# Altium PCB PCB1.PcbDoc
Units mm, origin at the board's own origin, x right, y up, seen from the top; angles counter-clockwise.
Board outline 53.34 x 80.01 mm, 2 copper layers (Top Layer, Bottom Layer); 34 components, 56 nets, 230 pads, 58 vias.
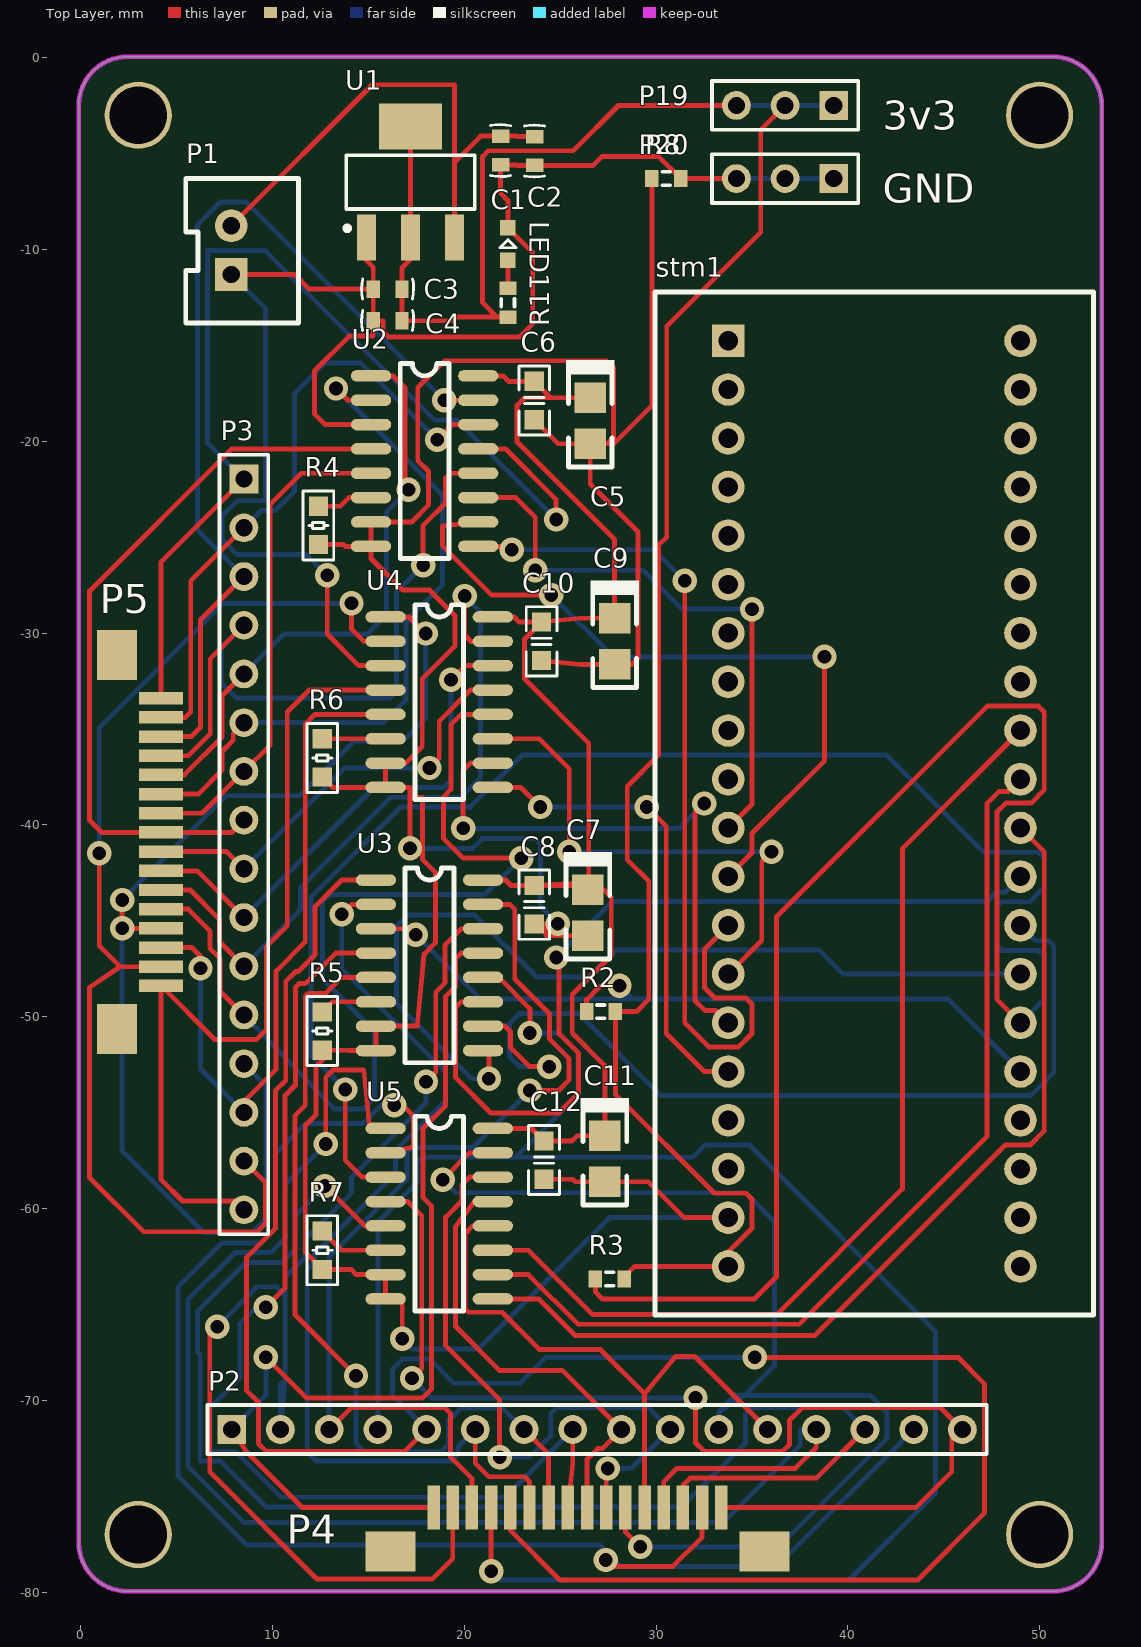
[diagram p0: Top Layer view]
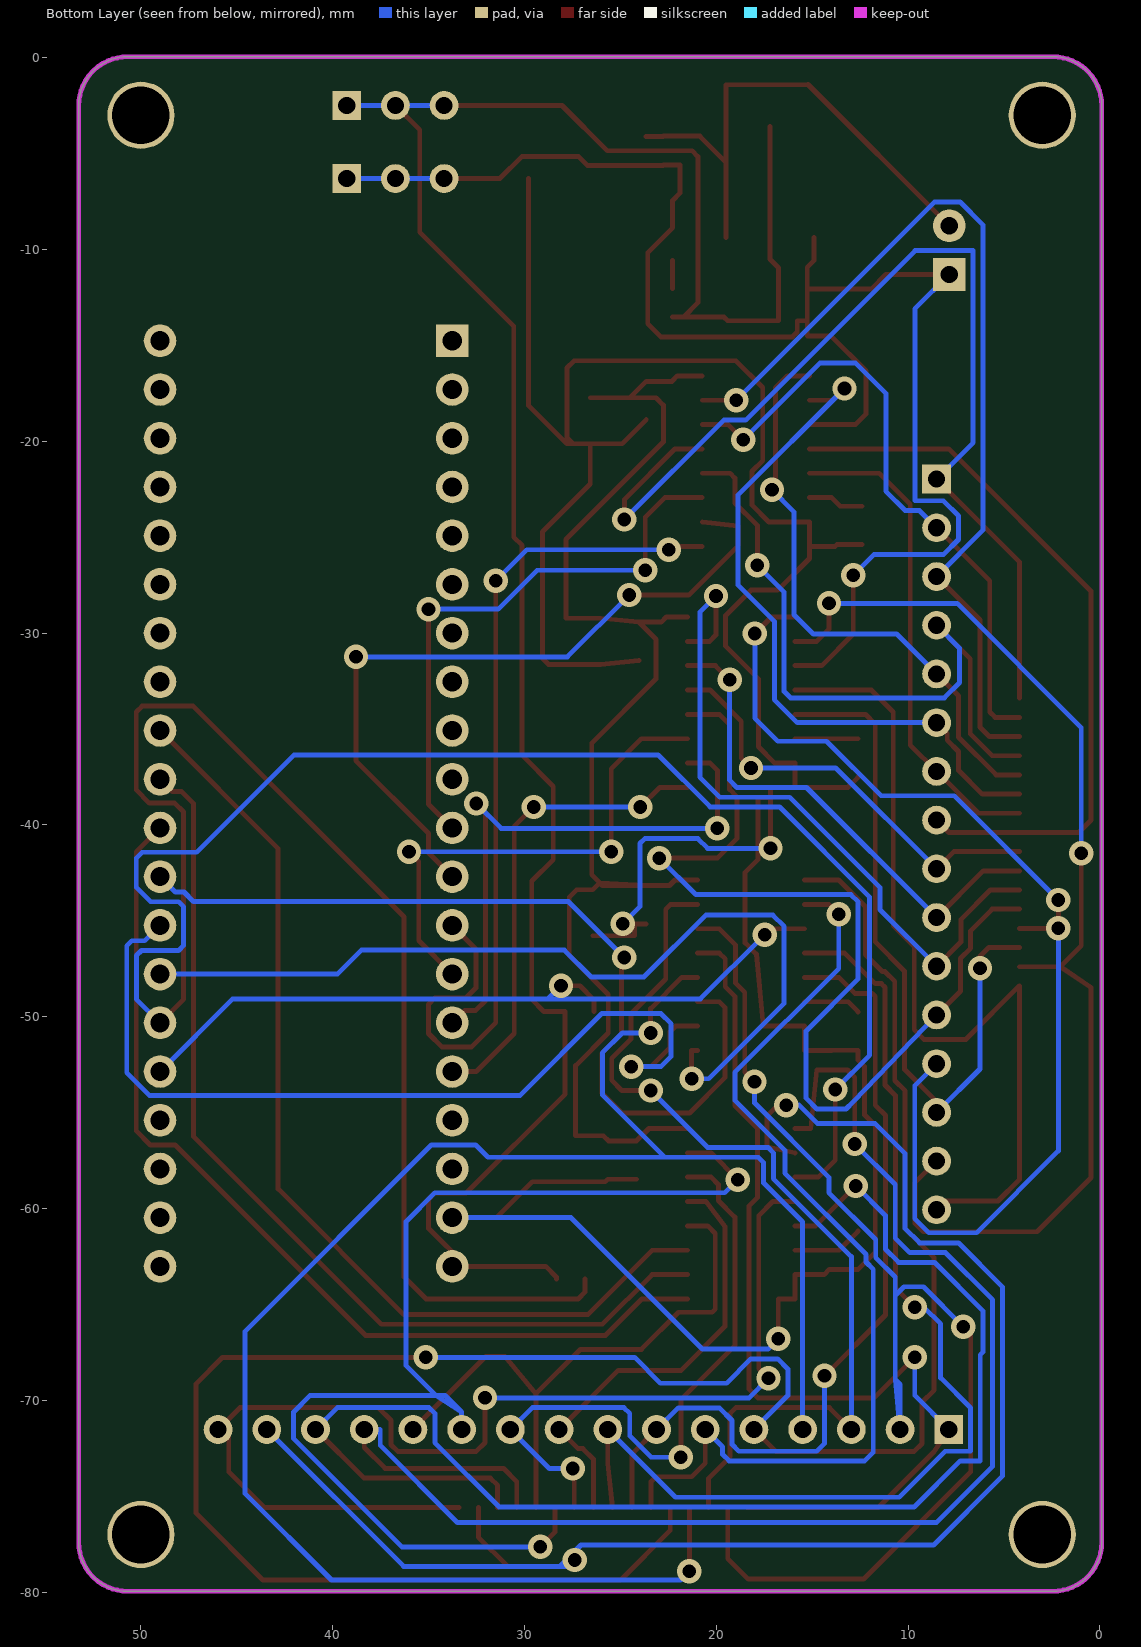
[diagram p1: Bottom Layer view, seen from below]
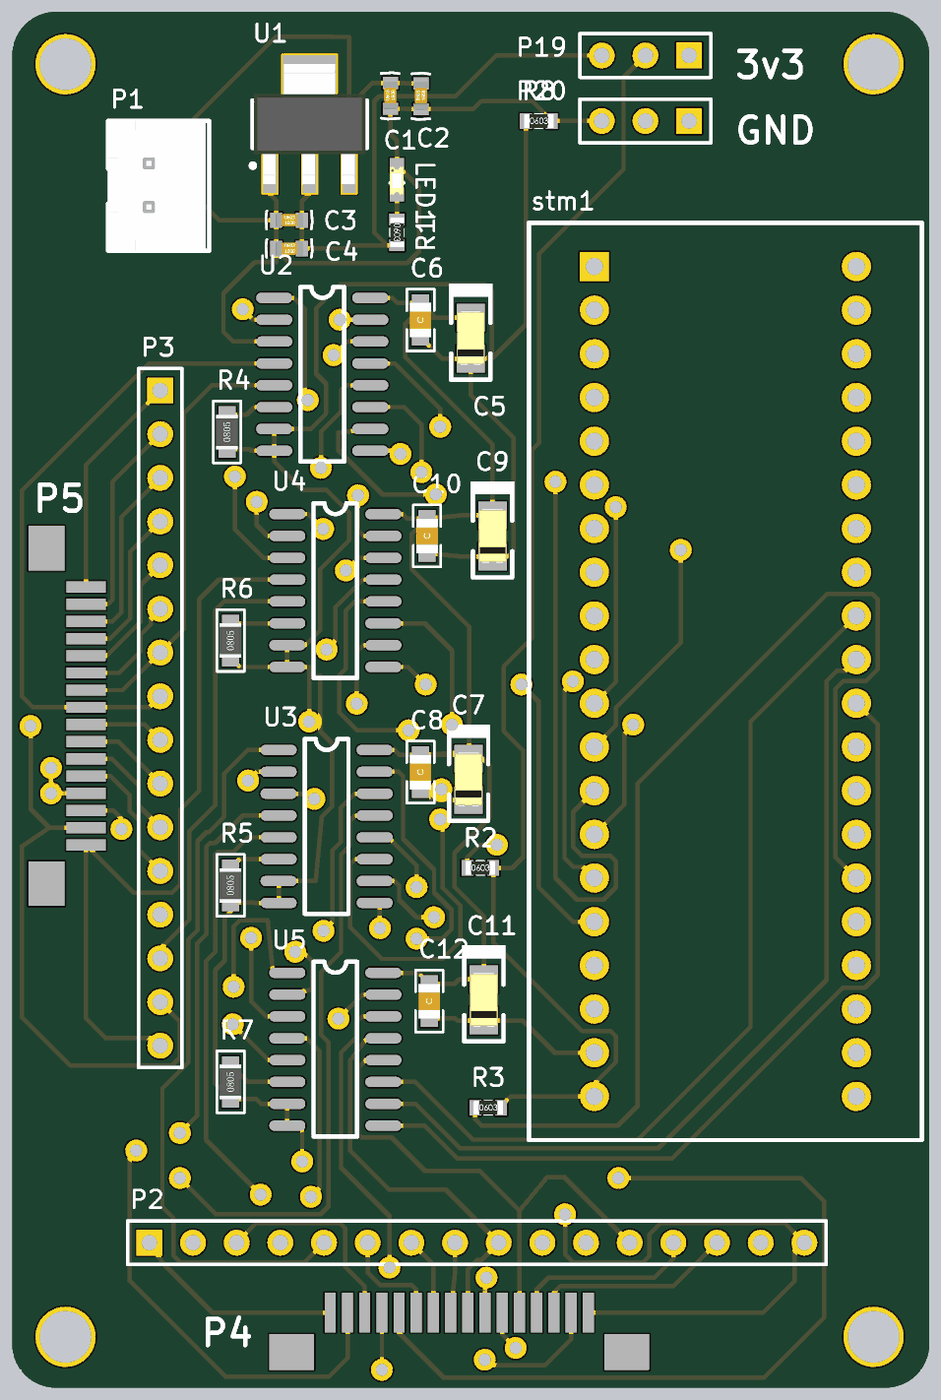
[diagram p2: 3D render of the assembled board from above, using the file's embedded part models]

## Layer stack, top to bottom
Top Solder: solder mask 0.0102, Solder Resist, Dk 3.5
Top Layer: signal copper 0.0356
Dielectric 1: dielectric 0.32, FR-4, Dk 4.8
Bottom Layer: signal copper 0.0356
Bottom Solder: solder mask 0.0102, Solder Resist, Dk 3.5

## Board outline
2.438,-79.959 cw(c2.438,-77.419) -0.102,-77.419 -0.102,-2.489 cw(c2.438,-2.489) 2.438,0.051 50.698,0.051 cw(c50.698,-2.489) 53.238,-2.489 53.238,-77.419 cw(c50.698,-77.419) 50.698,-79.959

## Design rules (kind name [scope] priority, off if disabled: settings)
Clearance [All] p1: gap=0.254 ignorepadtopadclearanceinfootprint=FALSE except(0: Arc-Hole Track-Hole SMDPad-Hole THPad-Hole Via-Hole Fill-Hole Poly-Hole Region-Hole Text-Hole)
PolygonConnect [All] p1: connectstyle=Relief reliefconductorwidth=0.254 reliefentries=4 polygonreliefangle="90 Angle" airgapwidth=0.254
RoutingVias [All] p1: holewidth=0.711 width=1.27 viastyle="Through Hole" minholewidth=0.711 minwidth=1.27 maxholewidth=0.711 maxwidth=1.27
SolderMaskExpansion [All] p1: expansion=0.102
Width [All] p1: maxlimit=0.254 minlimit=0.254 preferedwidth=0.254
30 further rules are at their usual default settings.

## Components (designator, comment, footprint, x,y, rotation, side; value= is the part's Value field where it differs from the comment)
C1 "" C-0603 22.428,-5.297 r90 top value=10uF
C2 "" C-0603 24.206,-5.321 r90 top value=0.1uF
C3 "" C-0603 15.545,-12.598 r0 top value=0.1uF
C4 "" C-0603 15.545,-14.249 r0 top value=10uF
C5 "Cap Pol2" Cap-TA 26.568,-18.929 r90 top value=10uF
C6 "Cap" 0805C 23.647,-17.872 r90 top value=100nF
C7 "Cap Pol2" Cap-TA 26.441,-44.583 r90 top value=10uF
C8 "Cap" 0805C 23.647,-44.161 r90 top value=100nF
C9 "Cap Pol2" Cap-TA 27.838,-30.429 r90 top value=10uF
C10 "Cap" 0805C 24.028,-30.429 r90 top value=100nF
C11 "Cap Pol2" Cap-TA 27.33,-57.41 r90 top value=10uF
C12 "Cap" 0805C 24.155,-57.48 r90 top value=100nF
LED1 "" CLED1608-0603 24.359,-9.398 r90 top
P1 "Header 2" XH2.54-LI-2P 7.849,-10.033 r90 top
P2 "Header 16" HDR1X16 7.874,-71.526 r0 top
P3 "Header 16" HDR1X16 8.509,-21.971 r270 top
P4 "Header 16" ffc_1mm 18.4,-75.59 r0 top
P5 "Header 16" ffc_1mm 4.191,-33.395 r270 top
P19 "Header 3" HDR1X3 39.268,-2.489 r180 top
P20 "Header 3" HDR1X3 39.268,-6.299 r180 top
R1 "Res3" R-0603 22.276,-12.725 r270 top value=370R
R2 "Res3" R-0603 27.076,-49.733 r0 top value=10k
R3 "Res3" R-0603 27.534,-63.678 r0 top value=10k
R4 "Res" 0805R 12.395,-24.384 r90 top value=1k
R5 "Res" 0805R 12.598,-50.749 r90 top value=1k
R6 "Res" 0805R 12.598,-36.509 r90 top value=1K
R7 "Res" 0805R 12.598,-62.179 r90 top value=1K
R8 "Res3" R-0603 30.48,-6.299 r0 top value=0
stm1 "stm32f103c8t6" PCBComponent_1 33.76,-14.76 r0 top
U1 "AMS1117-3V3" LM317 17.323,-6.481 r90 top value=Value
U2 "CD4051" SO16 19.202,-15.951 r0 top
U3 "CD4051" SO16 19.456,-42.24 r0 top
U4 "CD4051" SO16 19.964,-28.524 r0 top
U5 "CD4051" SO16 19.964,-55.194 r0 top

## Footprints (in the part's own frame and the unit in brackets; to place one, negate y for a bottom-side part, rotate by r counter-clockwise, add the part's x,y. Pads: shape width x height; smd on the part's side, far side on the other; paste and mask are expansions set on the pad)
0805C [mm]
  rect 1x1 smd: 1(-1,0) 2(1,0)
  silkscreen extent -1.8,-0.8 1.8,0.8, body extent -1.01,-0.62 1,0.63, height 0.92
0805R [mm]
  rect 1x1 smd: 1(-1,0) 2(1,0)
  silkscreen extent -1.8,-0.8 1.8,0.8, body extent -1,-0.63 1,0.63, height 0.55
C-0603 [mm]
  rect 0.7x0.9 smd: 1(-0.293,0.533) 2(1.207,0.533)
  silkscreen extent -0.9,0.02 1.81,1.07, body extent -0.32,0.13 1.28,0.93, height 0.8
Cap-TA [mm]
  rect 1.6x1.65 smd: 1(1.2,0) 2(-1.2,0)
  silkscreen extent -2.41,-1.27 3.18,1.27, body extent -1.6,-0.8 1.6,0.8, height 1.61
CLED1608-0603 [mil]
  rect 32x32 smd: 1(-46,82) 2(20.93,82)
  silkscreen extent -20,65 -4,99, body extent -46,67 16,98, height 24
ffc_1mm [mm]
  rect 0.65x2.3 smd: 1(0,0) 2(1,0) 3(2,0) 4(3,0) 5(4,0) 6(5,0) 7(6,0) 8(7,0) 9(8,0) 10(9,0) 11(10,0) 12(11,0) 13(12,0) 14(13,0) 15(14,0) 16(15,0)
  rect 2.6x2.1 smd: 17(-2.25,-2.3) 18(17.25,-2.3)
HDR1X3 [mm] "Connector; Header; 3 Position"
  rect 1.5x1.5 hole 0.9: 1(0,0)
  round 1.5 hole 0.9: 2(2.54,0) 3(5.08,0)
  silkscreen extent -1.27,-1.27 6.35,1.27
HDR1X16 [mm] "Connector; Header; 16 Position"
  rect 1.5x1.5 hole 0.9: 1(0,0)
  round 1.5 hole 0.9: 2(2.54,0) 3(5.08,0) 4(7.62,0) 5(10.16,0) 6(12.7,0) 7(15.24,0) 8(17.78,0) 9(20.32,0) 10(22.86,0) 11(25.4,0) 12(27.94,0) 13(30.48,0) 14(33.02,0) 15(35.56,0) 16(38.1,0)
  silkscreen extent -1.27,-1.27 39.37,1.27
LM317 [mm] "LM317, SOT23"
  rect 2.4x1 smd paste-0.102 mask+0.051: 1(-2.9,2.427) 2(-2.9,0.127) 3(-2.9,-2.173)
  rect 2.4x3.3 smd paste-0.102 mask+0.051: 4(2.9,0.127)
  silkscreen extent -2.54,-3.22 1.4,3.55, body extent -3.5,-3.12 3.5,3.38, height 1.68
PCBComponent_1 [mm]
  rect 1.7x1.7 hole 1: 1(0,0)
  round 1.7 hole 1: 2(0,-2.54) 3(0,-5.08) 4(0,-7.62) 5(0,-10.16) 6(0,-12.7) 7(0,-15.24) 8(0,-17.78) 9(0,-20.32) 10(0,-22.86) 11(0,-25.4) 12(0,-27.94) 13(0,-30.48) 14(0,-33.02) 15(0,-35.56) 16(0,-38.1) 17(0,-40.64) 18(0,-43.18) 19(0,-45.72) 20(0,-48.26) 21(15.24,-48.26) 22(15.24,-45.72) 23(15.24,-43.18) 24(15.24,-40.64) 25(15.24,-38.1) 26(15.24,-35.56) 27(15.24,-33.02) 28(15.24,-30.48) 29(15.24,-27.94) 30(15.24,-25.4) 31(15.24,-22.86) 32(15.24,-20.32) 33(15.24,-17.78) 34(15.24,-15.24) 35(15.24,-12.7) 36(15.24,-10.16) 37(15.24,-7.62) 38(15.24,-5.08) 39(15.24,-2.54) 40(15.24,0)
  silkscreen extent -3.81,-50.8 19.05,2.54
R-0603 [mm]
  rect 0.7x0.9 smd: 1(-0.699,0) 2(0.801,0)
  silkscreen extent -0.15,-0.35 0.25,0.35, body extent -0.8,-0.4 0.9,0.4, height 0.56
SO16 [mm]
  oval 2.1x0.6 smd: 1(-4.064,-0.635) 2(-4.064,-1.905) 3(-4.064,-3.175) 4(-4.064,-4.445) 5(-4.064,-5.715) 6(-4.064,-6.985) 7(-4.064,-8.255) 8(-4.064,-9.525) 9(1.524,-9.525) 10(1.524,-8.255) 11(1.524,-6.985) 12(1.524,-5.715) 13(1.524,-4.445) 14(1.524,-3.175) 15(1.524,-1.905) 16(1.524,-0.635)
  silkscreen extent -2.54,-10.16 0,0
XH2.54-LI-2P [mm] "接插件，2P"
  rect 1.7x1.7 hole 0.9: 1(-1.27,0)
  round 1.7 hole 0.9: 2(1.27,0)
  silkscreen extent -3.81,-3.51 3.74,2.37, body extent -3.77,-3.3 3.77,2.4, height 7.05

## Part data
C1 C2 C3 C4: library part "Cap Semi", "Capacitor (Semiconductor SIM Model)", LatestRevisionDate=29-May-2009, LatestRevisionNote="IPC-7351 Footprint Added.", PackageDescription="Chip Capacitor", PackageReference=C1206, Published=8-Jun-2000, Publisher="Altium Limited"
C5 C7 C9 C11: "Polarized Capacitor (Axial)", LatestRevisionDate=17-Jul-2002, LatestRevisionNote="Re-released for DXP Platform.", PackageDescription="Polarized Capacitor; 2 Leads", PackageReference=POLAR0.8, Published=8-Jun-2000, Publisher="Altium Limited"
C6 C8 C10 C12: "Capacitor", LatestRevisionDate=17-Jul-2002, LatestRevisionNote="Re-released for DXP Platform.", PackageDescription="Radial Cap, Thru-Hole; 2 Leads; 0.3 in Pin Spacing", PackageReference=RAD-0.3, Published=8-Jun-2000, Publisher="Altium Limited"
LED1: library part "LED Chip", "Typical Chip LED", Published=8-Jun-2000, Publisher="Altium Limited", Revision="July-2002: Re-released for DXP Platform."
P1: "Header, 2-Pin", LatestRevisionDate=17-Jul-2002, LatestRevisionNote="Re-released for DXP Platform.", Publisher="Altium Limited"
P2 P3 P4 P5: "Header, 16-Pin", LatestRevisionDate=17-Jul-2002, LatestRevisionNote="Re-released for DXP Platform.", Publisher="Altium Limited"
P19 P20: "Header, 3-Pin", LatestRevisionDate=17-Jul-2002, LatestRevisionNote="Re-released for DXP Platform.", Publisher="Altium Limited"
R1 R2 R3 R4 R5 R6 R7 R8: "Resistor", Published=8-Jun-2000, Publisher="Altium Limited"
  R1 R2 R3 R8: LatestRevisionDate=29-May-2009, LatestRevisionNote="IPC-7351 Footprint Added.", PackageDescription="Chip Resistor", PackageReference=J1-0603
  R4 R5 R6 R7: LatestRevisionDate=17-Jul-2002, LatestRevisionNote="Re-released for DXP Platform.", PackageDescription="Axial Device, Thru-Hole; 2 Leads; 0.4 in Pin Spacing", PackageReference=AXIAL-0.4
U1: library part LM317DCYR, "LM317DCYR-SOT223", Alternate_PartNumber=LM317DCY, Manufacturer="Texas Instruments", CompType=IC, MountType=SMT, PackageReference=DCY0004A, PartNumber=LM317DCYR, PIN_COUNT=4, RefDes=RefDes, RoHS=Y, SymbolCreater=Altium, Type=TYPE

## Free pads (board coordinates)
  round 3.5 hole 3: 19(3,-3) 20(50,-3) 21(50,-77) 22(3,-77)

## Via types
v1: diameter 1.27, hole 0.711, Top Layer to Bottom Layer, 58 vias

## Nets (pads, with @x,y where several pads share a name; then routed paths per layer and width w, separated by ;. In a path a pad name is that pad's centre, name@x,y a point inside that pad or via, vN(x,y) a via of type N, cw(c..) or ccw(c..) an arc to the next point about the centre after c; other vN are vias at no path point)
ADC1: R2.1 stm1.25 U3.3 | length 40.3
  Top Layer w0.254: U3.3 17.17,-45.415 v1(17.475,-45.72) ; R2.1 26.377,-49.112 27.102,-48.387 v1(28.092,-48.387)
  Bottom Layer w0.254: v1(17.475,-45.72) 20.828,-49.073 28.778,-49.073 ; v1(28.092,-48.387) 28.778,-49.073 ; stm1.25 45.213,-49.073 28.778,-49.073
ADC2: R3.1 stm1.26 U5.3 | length 140.3
  Top Layer w0.254: v1(13.792,-53.797) 13.792,-57.48 14.681,-58.369 U5.3 ; R3.1 26.834,-64.35 27.203,-64.719 35.128,-64.719 36.271,-63.576 36.271,-44.806 47.269,-33.807 49.936,-33.807 50.241,-34.112 50.241,-38.176 49.555,-38.862 48.235,-38.862 47.769,-39.328 47.769,-49.089 stm1.26
  Bottom Layer w0.254: v1(13.792,-53.797) 12.002,-52.007 12.002,-43.764 16.701,-39.065 20.32,-39.065 23.038,-36.347 42.012,-36.347 47.092,-41.427 49.936,-41.427 50.241,-41.732 50.241,-43.256 49.488,-44.009 48.031,-44.009 47.769,-44.271 47.769,-46.287 48.031,-46.549 49.968,-46.549 50.231,-46.812 50.231,-49.089 stm1.26
AGND: C1.1 C2.1 C3.1 C4.1 LED1.2 P1.1 P20.1 P20.2 P20.3 R8.2 U1.1 U2.3 U4.3 | length 88
  Top Layer w0.254: P1.1 11.151,-11.303 11.913,-12.065 C3.1 ; v1(12.852,-26.975) 12.852,-30.048 14.503,-31.699 U4.3 ; U1.1 14.896,-10.566 15.252,-10.922 C3.1 ; U2.3 12.741,-19.126 12.183,-18.569 12.183,-16.332 13.999,-14.517 15.252,-14.517 C4.1 ; P20.3 R8.2 30.138,-5.156 27.178,-5.156 26.721,-5.613 C2.1 22.782,-5.613 22.758,-5.589 C1.1 21.895,-7.061 22.276,-7.442 LED1.2 23.571,-10.162 23.571,-13.868 22.885,-14.554 16.027,-14.554 15.773,-14.3 15.773,-13.716 C4.1 ; C4.1 C3.1
  Bottom Layer w0.254: P1.1 9.64,-13.094 9.64,-23.102 8.153,-23.102 7.366,-23.889 7.366,-25.121 8.153,-25.908 11.786,-25.908 v1(12.852,-26.975) ; P20.3 P20.2 P20.1
DVDD_3V3: C3.2 C4.2 P19.1 P19.2 P19.3 R1.2 R2.2 R3.2 stm1.20 U1.2 U1.4 | length 120.3
  Top Layer w0.254: U1.4 U1.2 17.196,-10.504 16.752,-10.947 C3.2 C4.2 19.406,-13.716 19.595,-13.526 21.705,-13.526 ; R1.2 21.705,-13.526 ; R3.2 28.334,-63.576 28.891,-63.02 stm1.20@33.017,-63.02 ; stm1.20 stm1.20@33.017,-63.02 ; P19.3 28.042,-2.489 25.679,-4.851 21.26,-4.851 20.955,-5.156 20.955,-12.776 21.705,-13.526 ; P19.2 35.458,-3.759 35.458,-9.093 30.556,-13.995 30.556,-24.994 30.124,-25.425 30.124,-36.373 28.499,-37.998 28.499,-41.808 29.616,-42.926 29.616,-49.098 28.981,-49.733 R2.2 27.877,-54.039 33.045,-59.207 34.696,-59.207 35.001,-59.512 35.001,-61.036 stm1.20@33.017,-63.02
  Bottom Layer w0.254: P19.3 P19.2 P19.1
GND: C5.2 C6.1 C7.2 C8.1 C9.2 C10.1 C11.2 C12.1 R4.1 R5.1 R6.1 R7.1 R8.1 stm1.19 U2.7 U2.8 U3.7 U3.8 U4.7 U4.8 U5.7 U5.8 | length 176.1
  Top Layer w0.254: R4.1 13.716,-25.384 13.808,-25.476 U2.8 ; R6.1 13.138,-38.049 U4.8 ; v1(16.764,-66.802) 16.764,-64.719 U5.8 U5.7 14.367,-63.449 14.097,-63.179 R7.1 11.709,-62.29 11.709,-55.677 12.268,-55.118 12.268,-52.603 12.598,-52.273 R5.1 13.97,-51.749 13.986,-51.765 U3.8 U3.7 17.551,-50.495 17.907,-46.736 18.491,-46.152 18.491,-42.474 17.816,-41.799 17.816,-38.568 17.17,-38.568 ; v1(17.17,-41.224) 17.17,-38.568 ; C8.1 v1@24.269,-45.161 ; C6.1 24.904,-20.129 C5.2 ; C10.1 26.032,-31.629 C9.2 28.747,-31.629 29.058,-31.318 29.058,-24.714 26.568,-22.225 C5.2 ; C12.1 25.654,-58.48 25.784,-58.61 C11.2 29.591,-58.61 31.461,-60.48 stm1.19 ; v1(24.867,-45.161) v1@24.269,-45.161 ; C7.2 24.269,-45.783 v1@24.269,-45.161 ; R8.1 29.781,-18.136 27.788,-20.129 27.457,-20.129 ; U2.8 15.138,-26.111 16.789,-27.762 18.186,-27.762 19.507,-29.083 19.507,-30.683 17.805,-32.385 17.805,-35.916 16.942,-36.779 U4.7 U4.8 ; U2.8 U2.7 17.255,-24.206 18.144,-23.317 18.144,-21.573 17.577,-21.006 17.577,-17.196 18.974,-15.799 27.407,-15.799 27.788,-16.18 27.788,-19.799 27.457,-20.129 ; U4.8 17.17,-38.049 17.17,-38.568 ; C5.2 27.457,-20.129
  Bottom Layer w0.254: v1(16.764,-66.802) 17.297,-67.335 20.716,-67.335 27.572,-60.48 stm1.19 ; v1(17.17,-41.224) 20.447,-41.224 20.955,-40.716 23.724,-40.716 23.978,-40.97 23.978,-44.272 v1(24.867,-45.161)
NetLED1_1: LED1.1 R1.1 | length 1.5
  Top Layer w0.254: R1.1 LED1.1
Switch1_Down_A: stm1.11 U2.11 | length 30.2
  Top Layer w0.254: U2.11 22.682,-22.936 23.698,-23.952 v1(23.698,-26.721) ; stm1.11 35.001,-38.919 v1(35.001,-28.753)
  Bottom Layer w0.254: v1(23.698,-26.721) 29.337,-26.721 31.369,-28.753 v1(35.001,-28.753)
Switch1_Down_B: stm1.12 U2.10 | length 38.8
  Top Layer w0.254: U2.10 18.858,-24.424 18.858,-25.436 21.438,-28.016 v1(24.536,-28.016) ; stm1.12 35.001,-41.459 35.001,-40.437 38.786,-36.652 v1(38.786,-31.242)
  Bottom Layer w0.254: v1(24.536,-28.016) 27.762,-31.242 v1(38.786,-31.242)
Switch1_Down_C: stm1.13 U2.9 | length 47
  Top Layer w0.254: U2.9 22.301,-25.476 v1(22.479,-25.654) ; v1(31.496,-27.28) 31.496,-50.317 32.766,-51.587 34.29,-51.587 35.001,-50.876 35.001,-49.352 34.671,-49.022 33.045,-49.022 32.529,-48.506 32.529,-46.471 stm1.13
  Bottom Layer w0.254: v1(22.479,-25.654) 29.87,-25.654 v1(31.496,-27.28)
Switch1_Down_INH: R4.2 U2.6 | length 2.9
  Top Layer w0.254: R4.2 13.538,-23.384 13.986,-22.936 U2.6
Switch1_Up_A: stm1.29 U3.11 | length 46.3
  Top Layer w0.254: U3.11 19.837,-49.225 19.546,-49.517 19.546,-53.182 21.387,-55.024 24.917,-55.024 25.959,-53.982 25.959,-51.911 24.943,-50.895 24.943,-47.066 v1(24.79,-46.914)
  Bottom Layer w0.254: v1(24.79,-46.914) 27.711,-43.993 47.261,-43.993 47.753,-43.501 48.199,-43.501 stm1.29
Switch1_Up_B: stm1.28 U3.10 | length 48.5
  Top Layer w0.254: U3.10 22.123,-50.495 22.403,-50.775 22.403,-51.587 23.419,-52.603 v1(24.435,-52.603)
  Bottom Layer w0.254: v1(24.435,-52.603) 22.885,-52.603 22.352,-52.07 22.352,-50.368 22.885,-49.835 25.959,-49.835 30.226,-54.102 49.555,-54.102 50.739,-52.918 50.739,-46.304 50.476,-46.041 49.801,-46.041 stm1.28
Switch1_Up_C: stm1.27 U3.9 | length 47.5
  Top Layer w0.254: U3.9 21.285,-51.765 v1(21.285,-53.238)
  Bottom Layer w0.254: v1(21.285,-53.238) 20.388,-53.238 16.459,-49.309 16.459,-45.288 17.043,-44.704 20.549,-44.704 23.774,-47.93 26.518,-47.93 27.915,-46.533 38.506,-46.533 39.754,-47.78 stm1.27
Switch1_Up_INH: R5.2 U3.6 | length 3
  Top Layer w0.254: R5.2 13.122,-49.225 U3.6
Switch2_Down_A: stm1.14 U4.11 | length 26.8
  Top Layer w0.254: U4.11 23.901,-35.509 25.476,-37.084 v1(25.476,-41.402) ; stm1.14 35.509,-46.031 35.509,-41.91 v1(36.017,-41.402)
  Bottom Layer w0.254: v1(25.476,-41.402) v1(36.017,-41.402)
Switch2_Down_B: stm1.15 U4.10 | length 30.5
  Top Layer w0.254: v1(19.939,-40.184) 19.939,-37.16 20.32,-36.779 U4.10 ; v1(32.512,-38.887) 32.021,-39.378 32.021,-49.155 32.537,-49.672 33.112,-49.672 stm1.15
  Bottom Layer w0.254: v1(19.939,-40.184) 31.215,-40.184 v1(32.512,-38.887)
Switch2_Down_INH: R6.2 U4.6 | length 3.3
  Top Layer w0.254: R6.2 U4.6
Switch2_Up_A: stm1.32 U5.11 | length 51.9
  Top Layer w0.254: U5.11 23.343,-62.179 26.695,-65.532 36.291,-65.532 42.841,-58.983 42.841,-41.239 stm1.32
Switch2_Up_B: stm1.31 U5.10 | length 50.5
  Top Layer w0.254: U5.10 23.343,-63.449 25.933,-66.04 37.465,-66.04 47.261,-56.244 47.261,-38.873 47.866,-38.268 48.352,-38.268 stm1.31
Switch2_Up_INH: R7.2 U5.6 | length 3.7
  Top Layer w0.254: R7.2 13.598,-62.179 U5.6
Switch3_Down_C: stm1.16 U4.9 | length 24.7
  Top Layer w0.254: U4.9 22.936,-38.049 v1(23.952,-39.065) ; v1(29.515,-39.065) 30.531,-40.081 30.531,-50.876 32.515,-52.86 stm1.16
  Bottom Layer w0.254: v1(23.952,-39.065) v1(29.515,-39.065)
Switch3_Up_C: stm1.30 U5.9 | length 50.3
  Top Layer w0.254: U5.9 23.876,-64.719 25.781,-66.624 38.278,-66.624 48.209,-56.693 49.505,-56.693 50.241,-55.956 50.241,-41.401 stm1.30
Switch_Down_CH0: P3.1 P5.1 U2.13 | length 56.1
  Top Layer w0.254: P5.1 4.191,-26.289 P3.1 ; U2.13 22.149,-20.396 24.79,-23.038 v1(24.79,-24.079)
  Bottom Layer w0.254: P3.1 6.604,-20.066 6.604,-10.058 9.627,-10.058 18.466,-18.898 19.609,-18.898 v1(24.79,-24.079)
Switch_Down_CH1: P3.2 P5.2 U2.14 | length 33.2
  Top Layer w0.254: P5.2 5.457,-34.395 5.74,-34.112 5.74,-27.28 P3.2 ; v1(18.593,-19.914) 19.38,-19.126 U2.14
  Bottom Layer w0.254: P3.2 9.41,-23.61 10.148,-23.61 11.151,-22.607 11.151,-17.501 12.725,-15.926 14.605,-15.926 v1(18.593,-19.914)
Switch_Down_CH2: P3.3 P5.3 U2.15 | length 49.8
  Top Layer w0.254: P5.3 5.753,-35.395 6.248,-34.9 6.248,-29.312 P3.3 ; v1(18.948,-17.856) U2.15
  Bottom Layer w0.254: P3.3 6.096,-24.638 6.096,-8.712 7.29,-7.518 8.611,-7.518 v1(18.948,-17.856)
Switch_Down_CH3: P3.4 P5.4 U2.12 | length 36.5
  Top Layer w0.254: P5.4 5.613,-36.395 6.756,-35.252 6.756,-31.344 P3.4 ; v1(17.856,-26.467) 17.856,-24.384 19.025,-23.216 19.025,-21.92 19.279,-21.666 U2.12
  Bottom Layer w0.254: P3.4 7.315,-30.785 7.315,-32.588 8.103,-33.376 16.129,-33.376 16.459,-33.045 16.459,-27.864 v1(17.856,-26.467)
Switch_Down_CH4: P3.5 P5.5 U2.1 | length 30.9
  Top Layer w0.254: P5.5 5.404,-37.395 7.366,-35.433 7.366,-33.274 P3.5 ; U2.1 16.281,-16.586 16.916,-17.221 16.916,-22.352 v1(17.094,-22.53)
  Bottom Layer w0.254: P3.5 10.592,-30.048 14.935,-30.048 15.951,-29.032 15.951,-23.673 v1(17.094,-22.53)
Switch_Down_CH5: P3.6 P5.6 U2.2 | length 37
  Top Layer w0.254: P5.6 6.131,-38.395 7.366,-37.16 7.366,-36.174 7.956,-35.584 7.956,-35.224 P3.6 ; v1(13.31,-17.247) 13.919,-17.856 U2.2
  Bottom Layer w0.254: P3.6 15.773,-34.671 16.967,-33.477 16.967,-29.388 18.872,-27.483 18.872,-22.809 v1(13.31,-17.247)
Switch_Down_CH6: P3.7 P5.7 U2.5 | length 25.6
  Top Layer w0.254: P5.7 6.325,-39.395 P3.7 9.881,-35.839 9.881,-23.292 11.506,-21.666 U2.5
Switch_Down_CH7: P3.8 P5.8 U2.4 | length 38.3
  Top Layer w0.254: P3.8 7.865,-40.395 P5.8 1.092,-40.395 0.457,-39.76 0.457,-27.813 7.874,-20.396 U2.4
Switch_Down_CH8: P3.9 P5.9 U4.13 | length 22.7
  Top Layer w0.254: P5.9 7.613,-41.395 P3.9 ; v1(18.186,-37.033) 18.694,-36.525 18.694,-34.595 20.32,-32.969 U4.13
  Bottom Layer w0.254: P3.9 13.767,-37.033 v1(18.186,-37.033)
Switch_Down_CH9: P3.10 P5.10 U4.14 | length 26.8
  Top Layer w0.254: P5.10 6.073,-42.395 P3.10 ; v1(19.304,-32.436) 20.041,-31.699 U4.14
  Bottom Layer w0.254: P3.10 15.291,-38.049 18.923,-38.049 19.304,-37.668 v1(19.304,-32.436)
Switch_Down_CH10: P3.11 P5.11 U4.15 | length 37.2
  Top Layer w0.254: P5.11 5.702,-43.395 7.246,-44.94 7.246,-46.108 P3.11 ; v1(20.015,-28.067) 20.015,-30.099 20.345,-30.429 U4.15
  Bottom Layer w0.254: P3.11 11.469,-44.411 11.469,-43.256 16.168,-38.557 19.812,-38.557 20.853,-37.516 20.853,-28.905 v1(20.015,-28.067)
Switch_Down_CH11: P3.12 P5.12 U4.12 | length 52.9
  Top Layer w0.254: P5.12 5.613,-44.395 6.738,-45.52 6.738,-46.436 7.264,-46.962 7.264,-48.666 P3.12 ; U4.12 19.837,-34.239 19.304,-34.773 19.304,-38.151 18.923,-38.532 18.923,-40.716 19.939,-41.732 v1(22.962,-41.732)
  Bottom Layer w0.254: P3.12 12.856,-54.436 13.233,-54.813 14.757,-54.813 15.316,-54.254 15.316,-50.749 12.598,-48.031 12.598,-44.018 12.979,-43.637 21.057,-43.637 v1(22.962,-41.732)
Switch_Down_CH12: P3.13 P5.13 U4.1 | length 60.1
  Top Layer w0.254: v1(2.159,-45.395) v1@2.774,-45.395 ; v1(2.159,-43.917) 2.159,-44.78 v1@2.774,-45.395 ; P5.13 v1@2.774,-45.395 ; U4.1 17.12,-29.159 v1(17.983,-30.023)
  Bottom Layer w0.254: v1(2.159,-45.395) 2.159,-56.998 6.426,-61.265 8.915,-61.265 9.652,-60.528 9.652,-53.594 P3.13 ; v1(2.159,-43.917) 7.595,-38.481 11.405,-38.481 14.249,-35.636 16.789,-35.636 17.983,-34.442 v1(17.983,-30.023)
Switch_Down_CH13: P3.14 P5.14 U4.5 | length 37.3
  Top Layer w0.254: P5.14 5.791,-46.395 6.248,-46.853 v1(6.248,-47.473) ; P3.14 8.553,-54.947 8.553,-54.384 10.185,-52.751 10.185,-47.624 11.709,-46.1 11.709,-34.747 12.217,-34.239 U4.5
  Bottom Layer w0.254: v1(6.248,-47.473) 6.248,-52.73 P3.14
Switch_Down_CH14: P3.15 P5.15 U4.2 | length 60.4
  Top Layer w0.254: v1(0.965,-41.478) 0.965,-46.304 2.056,-47.395 ; P5.15 2.056,-47.395 ; P3.15 9.64,-58.662 9.64,-60.782 9.208,-61.214 3.277,-61.214 0.457,-58.395 0.457,-48.488 2.056,-47.395 ; v1(14.122,-28.448) 14.122,-29.794 14.757,-30.429 U4.2
  Bottom Layer w0.254: v1(0.965,-41.478) 0.965,-34.925 7.442,-28.448 v1(14.122,-28.448)
Switch_Down_CH15: P3.16 P5.16 U4.4 | length 44.8
  Top Layer w0.254: P3.16 8.509,-59.614 5.309,-59.614 4.191,-58.496 P5.16 6.977,-51.181 9.169,-51.181 9.677,-50.673 9.677,-46.355 10.77,-45.263 10.77,-34.112 11.913,-32.969 U4.4
Switch_Up_CH0: P2.1 P4.1 U3.13 | length 51.4
  Top Layer w0.254: P2.1 8.67,-72.72 11.541,-75.59 P4.1 ; v1(9.652,-67.767) 11.76,-69.875 17.831,-69.875 18.288,-69.418 18.288,-59.868 17.856,-59.436 17.856,-55.804 19.025,-54.635 19.025,-48.946 19.533,-48.438 19.533,-46.99 19.837,-46.685 U3.13
  Bottom Layer w0.254: P2.1 9.652,-69.748 v1(9.652,-67.767)
Switch_Up_CH1: P2.2 P4.2 U3.14 | length 64.2
  Top Layer w0.254: v1(7.112,-66.165) 6.731,-66.546 6.731,-73.736 12.319,-79.324 18.333,-79.324 19.4,-78.257 P4.2 ; v1(18.005,-53.395) 18.513,-52.887 18.513,-48.73 19.001,-48.242 19.001,-46.252 19.837,-45.415 U3.14
  Bottom Layer w0.254: v1(7.112,-66.165) 9.193,-64.084 10.209,-64.084 10.668,-64.543 ; v1(18.005,-53.395) 18.005,-54.493 14.122,-58.375 14.122,-59.181 11.684,-61.619 11.684,-62.56 10.668,-63.576 10.668,-64.543 ; 10.668,-68.91 10.668,-64.543 ; 10.668,-68.91 10.414,-69.164 P2.2 10.668,-68.91
Switch_Up_CH2: P2.3 P4.3 U3.15 | length 50.2
  Top Layer w0.254: P2.3 14.097,-70.383 18.974,-70.383 19.279,-70.688 19.279,-72.949 20.4,-74.07 P4.3 ; U3.15 22.377,-44.145 22.634,-44.402 22.634,-48.036 24.435,-49.837 24.435,-51.156 25.451,-52.172 25.451,-53.315 24.917,-53.848 v1(23.419,-53.848)
  Bottom Layer w0.254: P2.3 12.954,-62.509 17.018,-58.445 17.018,-57.099 17.297,-56.82 20.447,-56.82 v1(23.419,-53.848)
Switch_Up_CH3: P2.4 P4.4 U3.12 | length 97.3
  Top Layer w0.254: U3.12 21.793,-47.955 23.419,-49.581 v1(23.419,-50.851) ; v1(21.4,-78.918) P4.4
  Bottom Layer w0.254: P2.4 15.494,-60.706 17.526,-58.674 17.526,-57.607 17.805,-57.328 22.682,-57.328 ; v1(21.4,-78.918) 21.854,-79.371 40.059,-79.371 44.577,-74.854 44.577,-66.421 34.849,-56.693 32.537,-56.693 31.902,-57.328 22.682,-57.328 ; v1(23.419,-50.851) 24.892,-50.851 25.933,-51.892 25.933,-54.077 22.682,-57.328
Switch_Up_CH4: P2.5 P4.5 U3.1 | length 114.8
  Top Layer w0.254: U3.1 13.614,-42.875 12.217,-44.272 12.217,-46.761 11.328,-47.65 11.201,-47.65 10.693,-48.158 10.693,-53.328 10.148,-53.873 10.148,-61.048 8.636,-62.56 8.636,-69.469 9.271,-70.104 9.271,-72.263 9.677,-72.669 16.891,-72.669 P2.5 ; P4.5 22.4,-76.784 24.987,-79.371 43.641,-79.371 47.117,-75.895 47.117,-69.139 45.745,-67.767 v1(35.154,-67.767)
  Bottom Layer w0.254: P2.5 16.256,-69.748 16.256,-68.377 16.789,-67.843 18.19,-67.843 19.46,-69.113 22.911,-69.113 24.257,-67.767 v1(35.154,-67.767)
Switch_Up_CH5: P2.6 P4.6 U3.2 | length 51.5
  Top Layer w0.254: v1(13.614,-44.653) 14.122,-44.145 U3.2 ; P2.6 20.574,-73.279 21.285,-73.99 23.146,-73.99 23.4,-74.244 P4.6
  Bottom Layer w0.254: v1(13.614,-44.653) 13.614,-47.498 19.025,-52.908 19.025,-54.365 16.418,-56.972 16.418,-58.162 12.192,-62.388 12.192,-62.793 11.811,-63.174 11.811,-72.72 12.256,-73.165 19.329,-73.165 19.673,-72.822 19.673,-72.427 P2.6
Switch_Up_CH6: P2.7 P4.7 U3.5 | length 44.6
  Top Layer w0.254: v1(14.351,-68.732) 11.176,-65.557 11.176,-55.143 11.709,-54.61 11.709,-48.946 11.868,-48.787 12.776,-48.787 13.608,-47.955 U3.5 ; P2.7 24.4,-72.812 P4.7
  Bottom Layer w0.254: v1(14.351,-68.732) 14.351,-72.251 14.757,-72.657 18.821,-72.657 19.177,-72.302 19.177,-71.056 19.837,-70.395 21.983,-70.395 P2.7
Switch_Up_CH7: P2.8 P4.8 U3.4 | length 56.7
  Top Layer w0.254: v1(9.652,-65.149) 10.656,-64.145 10.656,-54.109 11.201,-53.563 11.201,-48.463 11.386,-48.279 11.709,-48.279 13.303,-46.685 U3.4 ; P4.8 25.654,-73.304 P2.8
  Bottom Layer w0.254: v1(9.652,-65.149) 9.169,-65.149 8.301,-66.018 8.301,-68.838 6.743,-70.395 6.743,-72.657 8.065,-72.657 10.465,-75.057 22.123,-75.057 P2.8
Switch_Up_CH8: P2.9 P4.9 U5.13 | length 23.6
  Top Layer w0.254: U5.13 20.523,-59.639 19.545,-60.947 19.545,-66.154 21.832,-68.441 25.109,-68.441 P2.9 27.198,-72.522 26.949,-72.522 26.4,-73.072 P4.9
Switch_Up_CH9: P2.10 P4.10 U5.14 | length 34.8
  Top Layer w0.254: U5.14 20.269,-58.369 19.888,-58.75 19.888,-59.586 19.025,-60.449 19.025,-67.158 21.844,-69.977 v1(21.844,-72.974) ; P4.10 27.4,-73.641 v1(27.483,-73.558)
  Bottom Layer w0.254: v1(21.844,-72.974) 23.393,-72.974 24.511,-71.857 24.511,-70.688 24.816,-70.383 29.591,-70.383 P2.10 28.702,-73.558 v1(27.483,-73.558)
Switch_Up_CH10: P2.11 P4.11 U5.15 | length 62.1
  Top Layer w0.254: v1(18.872,-58.496) 20.269,-57.099 U5.15 ; P4.11 28.4,-76.863 v1(29.185,-77.648)
  Bottom Layer w0.254: v1(18.872,-58.496) 19.558,-59.182 34.671,-59.182 36.17,-60.681 36.17,-68.199 34.62,-69.748 ; v1(29.185,-77.648) 36.398,-77.648 42.037,-72.009 42.037,-70.612 41.173,-69.748 34.62,-69.748 ; P2.11 33.274,-70.601 ; 33.274,-70.601 34.62,-69.748 ; 33.274,-70.601 34.126,-69.748 34.62,-69.748
Switch_Up_CH11: P2.12 P4.12 U5.12 | length 31.6
  Top Layer w0.254: U5.12 20.451,-60.909 20.053,-61.306 20.053,-65.259 20.206,-65.412 21.965,-65.412 23.901,-67.348 27.076,-67.348 29.4,-69.672 ; P4.12 29.4,-69.672 ; P2.12 32.004,-67.716 31.013,-67.716 29.4,-69.672
Switch_Up_CH12: P2.13 P4.13 U5.1 | length 77.8
  Top Layer w0.254: v1(12.776,-56.642) 12.776,-53.162 13.157,-52.781 14.757,-52.781 15.07,-55.829 U5.1 ; P4.13 30.4,-74.244 31.093,-73.551 37.266,-73.551 38.354,-72.463 P2.13
  Bottom Layer w0.254: v1(12.776,-56.642) 10.668,-58.75 10.668,-61.544 9.906,-62.306 8.044,-62.306 5.588,-64.762 5.588,-73.451 8.519,-76.382 33.491,-76.382 37.516,-72.357 37.516,-71.526 P2.13
Switch_Up_CH13: P2.14 P4.14 U5.5 | length 73.3
  Top Layer w0.254: v1(12.725,-58.826) 14.808,-60.909 U5.5 ; P4.14 31.4,-74.435 31.775,-74.059 38.361,-74.059 P2.14
  Bottom Layer w0.254: v1(12.725,-58.826) 11.176,-60.376 11.176,-62.126 10.487,-62.814 8.617,-62.814 6.096,-65.335 6.096,-67.489 6.235,-67.628 6.235,-73.165 7.278,-73.165 9.677,-75.565 31.318,-75.565 34.671,-72.212 34.671,-70.688 34.976,-70.383 39.751,-70.383 P2.14
Switch_Up_CH14: P2.15 P4.15 U5.2 | length 83.2
  Top Layer w0.254: U5.2 17.348,-56.794 17.348,-55.169 16.789,-54.61 v1(16.358,-54.61) ; v1(27.381,-78.334) 27.711,-78.664 30.876,-78.664 32.4,-77.14 P4.15
  Bottom Layer w0.254: v1(16.358,-54.61) 15.679,-54.61 14.714,-55.575 11.709,-55.575 10.16,-57.125 10.16,-61.036 9.398,-61.798 7.366,-61.798 5.08,-64.084 5.08,-73.965 8.663,-77.548 27.053,-77.548 28.169,-78.664 ; v1(27.381,-78.334) 27.711,-78.664 28.169,-78.664 ; P2.15 36.297,-78.664 28.169,-78.664
Switch_Up_CH15: P2.16 P4.16 U5.4 | length 60.2
  Top Layer w0.254: U5.4 17.043,-59.639 17.78,-60.376 17.78,-68.351 v1(17.272,-68.859) ; v1(32.055,-69.875) 32.055,-72.212 32.512,-72.669 36.601,-72.669 36.957,-72.314 36.957,-71.044 37.617,-70.383 44.831,-70.383 P2.16 45.415,-71.526 45.415,-73.736 43.561,-75.59 P4.16
  Bottom Layer w0.254: v1(17.272,-68.859) 18.288,-69.875 v1(32.055,-69.875)
VDD_3V3: C5.1 C6.2 C7.1 C8.2 C9.1 C10.2 C11.1 C12.2 U2.16 U3.16 U4.16 U5.16 | length 73.2
  Top Layer w0.254: U2.16 22.022,-16.586 22.308,-16.872 C6.2 24.504,-17.729 ; U3.16 22.149,-42.875 22.435,-43.161 C8.2 ; U5.16 23.504,-55.829 C12.2 25.616,-56.48 25.886,-56.21 C11.1 27.33,-52.553 25.629,-50.851 25.629,-48.844 27.661,-46.812 27.661,-43.764 27.28,-43.383 C7.1 C7.1@26.076,-43.018 ; U4.16 22.606,-29.159 22.876,-29.429 C10.2 ; C5.1 24.504,-17.729 ; C8.2 25.933,-43.161 C7.1@26.076,-43.018 ; C8.2 C7.1@26.076,-43.018 ; C10.2 26.032,-29.229 C9.1 27.838,-25.118 22.758,-20.038 22.758,-18.11 23.139,-17.729 24.504,-17.729 ; C10.2 23.139,-30.318 23.139,-32.385 26.492,-35.738 26.492,-42.602 C7.1@26.076,-43.018
VDD_5V: C1.2 C2.2 P1.2 U1.3 | length 27.4
  Top Layer w0.254: P1.2 15.215,-1.397 19.496,-1.411 19.496,-5.447 ; U1.3 19.496,-5.447 ; C2.2 22.782,-4.113 22.758,-4.089 C1.2 20.853,-4.089 19.496,-5.447
pads on no net: P4.17 P4.18 P5.17 P5.18 stm1.1 stm1.2 stm1.3 stm1.4 stm1.5 stm1.6 stm1.7 stm1.8 stm1.9 stm1.10 stm1.17 stm1.18 stm1.21 stm1.22 stm1.23 stm1.24 stm1.33 stm1.34 stm1.35 stm1.36 stm1.37 stm1.38 stm1.39 stm1.40

## Keep-outs
Keep-Out Layer:
  the board outline again, w0.254

## Silkscreen, mask and mechanical layers (free items; w line width, h text height)
Top Overlay:
  text "3v3" at 41.808,-3.759 h1.52
  text "GND" at 41.808,-7.569 h1.52